# Altium PCB Main.PcbDoc
Units mm, origin at the board's own origin, x right, y up, seen from the top; angles counter-clockwise.
Board outline 108.2 x 55.5 mm, 2 copper layers (Top Layer, Bottom Layer); 44 components, 33 nets, 136 pads, 6 vias.
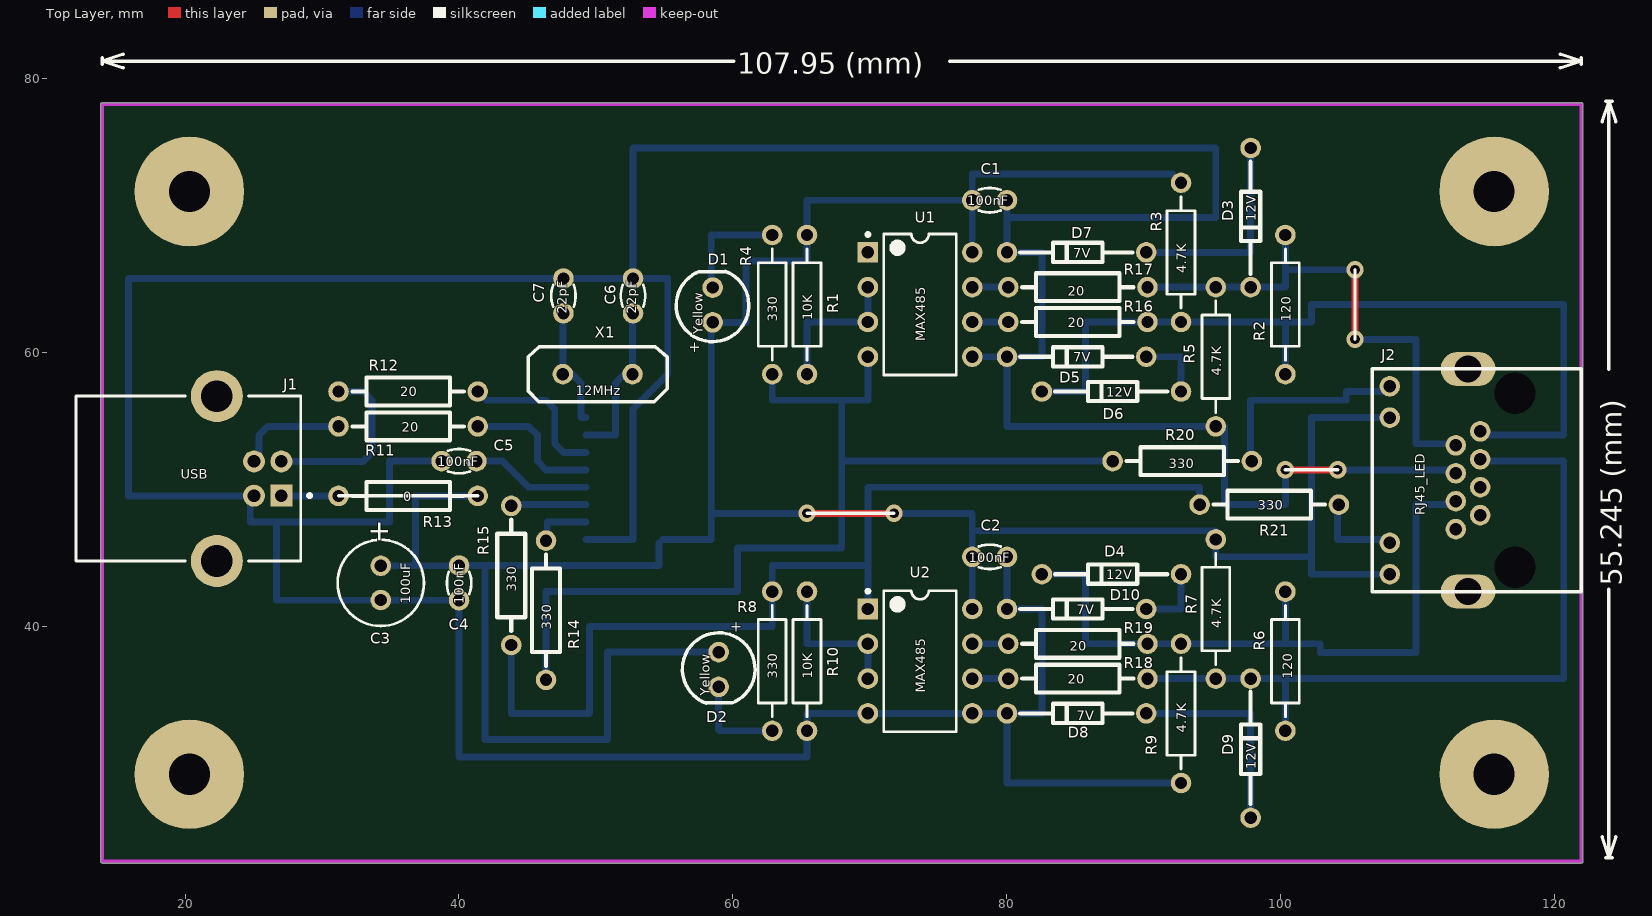
[diagram p0: Top Layer view]
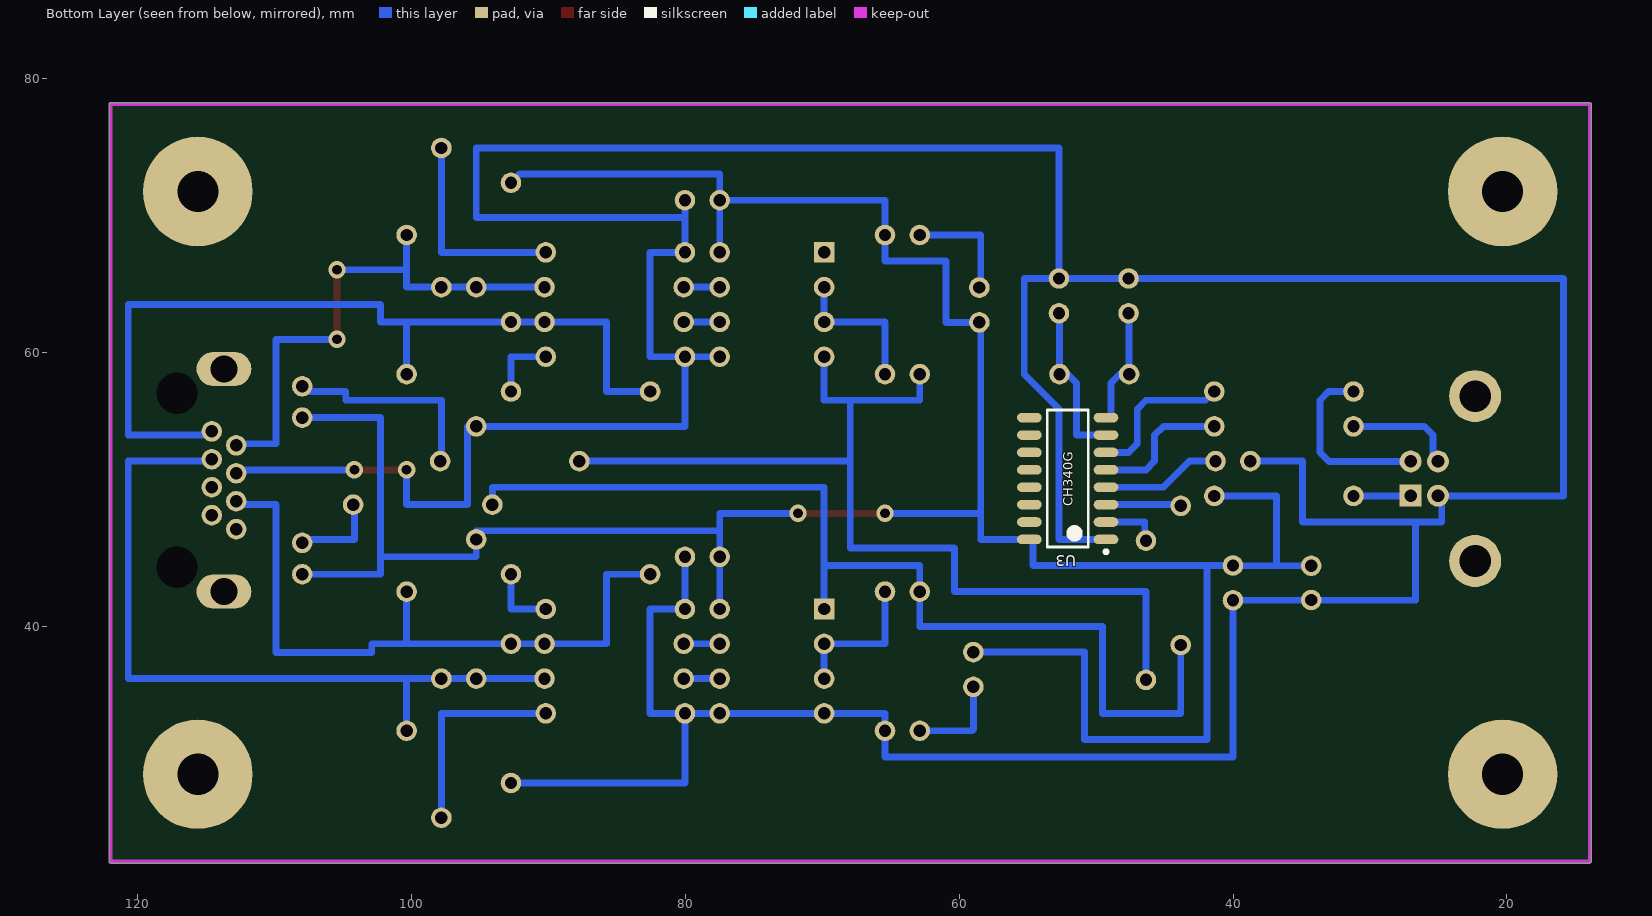
[diagram p1: Bottom Layer view, seen from below]

## Layer stack, top to bottom
Top Solder: solder mask 0.0102, Solder Resist, Dk 3.5
Top Layer: signal copper 0.0356
Dielectric 1: dielectric 0.32, FR-4, Dk 4.8
Bottom Layer: signal copper 0.0356
Bottom Solder: solder mask 0.0102, Solder Resist, Dk 3.5

## Board outline
13.97,22.733 cw(c13.97,22.86) 13.843,22.86 13.843,78.105 cw(c13.97,78.105) 13.97,78.232 121.92,78.232 cw(c121.92,78.105) 122.047,78.105 122.047,22.86 cw(c121.92,22.86) 121.92,22.733

## Design rules (kind name [scope] priority, off if disabled: settings)
Clearance [All] p1: gap=0.3
ComponentClearance [All] p1 off: gap=0 collisioncheckmode=3 verticalgap=0 showdistances=FALSE
Height [All] p1: minheight=0 maxheight=50 prefheight=12.7
PolygonConnect [All] p1: connectstyle=Relief reliefconductorwidth=0.254 reliefentries=4 polygonreliefangle="90 Angle" airgapwidth=0.254
RoutingVias [All] p1: holewidth=0.711 width=1.27 viastyle="Through Hole" minholewidth=0.711 minwidth=1.27 maxholewidth=0.711 maxwidth=1.27
SolderMaskExpansion [All] p1: expansion=0.102
Width [All] p1: maxlimit=0.5 minlimit=0.5 preferedwidth=0.5
28 further rules are at their usual default settings.

## Components (designator, comment, footprint, x,y, rotation, side; value= is the part's Value field where it differs from the comment)
C1 "100nF" CAPNTO2.54-3.05x1.78A 78.74,71.12 r180 top
C2 "100nF" CAPNTO2.54-3.05x1.78A 78.74,45.085 r180 top
C3 "100uF" CAPPR2.5-6.3x5 34.29,43.18 r270 top
C4 "100nF" CAPNTO2.54-3.05x1.78A 40.005,43.18 r90 top
C5 "100nF" CAPNTO2.54-3.05x1.78A 40.005,52.07 r0 top
C6 "22pF" CAPNTO2.54-3.05x1.78A 52.705,64.135 r90 top
C7 "22pF" CAPNTO2.54-3.05x1.78A 47.625,64.135 r90 top
D1 "Yellow" LED-5mm_Red 58.42,63.5 r90 top
D2 "Yellow" LED-5mm_Red 59.055,36.83 r270 top
D3 "12V" DIODE0.4_Glass 97.79,69.85 r270 top
D4 "12V" DIODE0.4_Glass 87.63,43.815 r180 top
D5 "7V" DIODE0.4_Glass 85.09,59.69 r180 top
D6 "12V" DIODE0.4_Glass 87.63,57.15 r180 top
D7 "7V" DIODE0.4_Glass 85.09,67.31 r180 top
D8 "7V" DIODE0.4_Glass 85.09,33.655 r180 top
D9 "12V" DIODE0.4_Glass 97.79,31.115 r90 top
D10 "7V" DIODE0.4_Glass 85.09,41.275 r180 top
J1 "USB" USB2.5-2H4D 26.035,50.8 r180 top
J2 "RJ45_LED" RJ45-AMP_LED 107.95,43.815 r90 top
R1 "10K" AXIAL-0.4#1 65.405,63.5 r90 top
R2 "120" AXIAL-0.4#1 100.33,63.5 r90 top
R3 "4.7K" AXIAL-0.4#1 92.71,67.31 r270 top
R4 "330" AXIAL-0.4#1 62.865,63.5 r90 top
R5 "4.7K" AXIAL-0.4#1 95.25,59.69 r270 top
R6 "120" AXIAL-0.4#1 100.33,37.465 r90 top
R7 "4.7K" AXIAL-0.4#1 95.25,41.275 r270 top
R8 "330" AXIAL-0.4#1 62.865,37.465 r270 top
R9 "4.7K" AXIAL-0.4#1 92.71,33.655 r270 top
R10 "10K" AXIAL-0.4#1 65.405,37.465 r90 top
R11 "20" AXIAL-0.4#2 37.465,54.61 r180 top
R12 "20" AXIAL-0.4#2 37.465,57.15 r180 top
R13 "0" AXIAL-0.4#2 37.465,49.53 r180 top
R14 "330" AXIAL-0.4#2 46.355,40.005 r90 top
R15 "330" AXIAL-0.4#2 43.815,42.545 r90 top
R16 "20" AXIAL-0.4#2 86.36,62.23 r180 top
R17 "20" AXIAL-0.4#2 86.36,64.77 r180 top
R18 "20" AXIAL-0.4#2 86.36,36.195 r180 top
R19 "20" AXIAL-0.4#2 86.36,38.735 r180 top
R20 "330" AXIAL-0.4#2 93.98,52.07 r180 top
R21 "330" AXIAL-0.4#2 100.33,48.895 r180 top
U1 "MAX485" PA8 73.66,63.5 r0 top
U2 "MAX485" PA8 73.66,37.465 r0 top
U3 "CH340G" SOIC127P602-16BM 52.07,50.8 r0 bottom
X1 "12MHz" XTAL_1 50.165,58.42 r180 top

## Footprints (in the part's own frame and the unit in brackets; to place one, negate y for a bottom-side part, rotate by r counter-clockwise, add the part's x,y. Pads: shape width x height; smd on the part's side, far side on the other; paste and mask are expansions set on the pad)
AXIAL-0.4#1 [mm] "Axial Device, Thru-Hole; 2 Leads; 0.4 in Pin Spacing"
  round 1.5 hole 0.9: 1(-5.08,0) 2(5.08,0)
  silkscreen extent -4.06,-1.02 4.06,1.02
AXIAL-0.4#2 [mm]
  round 1.5 hole 0.9: 1(-3.9,0) 2(6.26,0)
  silkscreen extent -2.88,-1.02 5.24,1.02, body extent -4.19,-1.19 6.58,1.12, height 3.51
CAPNTO2.54-3.05x1.78A [mm] "Capacitor, Radial, Tantalum, Non-Polarised; Body 3.05 x 1.78 x 3.43 mm (WxTxH max); Pin Spacing 2.54 mm (typ)"
  round 1.5 hole 0.9: 1(-1.27,0) 2(1.27,0)
  silkscreen extent -0.8,-0.89 0.8,0.89
CAPPR2.5-6.3x5 [mm] "Capacitor, Electrolytic, Radial; Body 6.3 x 5 mm (Dia.xH typ); Pin Spacing 2.5 mm (typ)"
  round 1.5 hole 0.9: 1(-1.25,0) 2(1.25,0)
  silkscreen extent -3.15,-3.15 3.15,3.15
DIODE0.4_Glass [mm] "created by: M.Hariri (designer)"
  round 1.5 hole 0.9: 1(-5.08,0) 2(5.08,0)
  silkscreen extent -4.08,-0.7 4.12,0.7
LED-5mm_Red [mm]
  round 1.5 hole 0.9: 1(-1.3,-0.1) 2(1.24,-0.1)
  silkscreen extent -2.71,-2.74 2.43,2.56, body extent -2.6,-2.64 2.48,2.46, height 9.6
PA8 [mm] "DIP, 8-Leads, Row Spacing 7.62mm, Pitch 2.54mm, Body 9.38x7.24mm"
  rect 1.5x1.5 hole 0.9: 1(-3.81,3.81)
  round 1.5 hole 0.9: 2(-3.81,1.27) 3(-3.81,-1.27) 4(-3.81,-3.81) 5(3.81,-3.81) 6(3.81,-1.27) 7(3.81,1.27) 8(3.81,3.81)
  silkscreen extent -3.93,-5.15 2.65,5.23, body extent -3.6,-5.15 3.6,5.15, height 4.58
RJ45-AMP_LED [mm]
  round 1.5 hole 0.9: 1(10.43,-6.6) 2(9.41,-4.82) 3(8.39,-6.6) 4(7.37,-4.82) 5(6.35,-6.6) 6(5.33,-4.82) 7(4.31,-6.6) 8(3.29,-4.82) 13(13.72,0) 14(11.43,0) 15(2.29,0) 16(0,0)
  round 0 hole 3: 9(13.21,-9.14) 10(0.51,-9.14)
  oval 2.5x4 hole 2: 11(14.985,-5.71) 12(-1.265,-5.71)
  silkscreen extent -1.26,-13.97 14.99,1.27
SOIC127P602-16BM [mm] "SOIC, 16-Leads, Body 9.9x3.9mm, Pitch 1.27mm, IPC Low Density"
  oval 1.8x0.7 smd: 1(-2.8,4.445) 2(-2.8,3.175) 3(-2.8,1.905) 4(-2.8,0.635) 5(-2.8,-0.635) 6(-2.8,-1.905) 7(-2.8,-3.175) 8(-2.8,-4.445) 9(2.8,-4.445) 10(2.8,-3.175) 11(2.8,-1.905) 12(2.8,-0.635) 13(2.8,0.635) 14(2.8,1.905) 15(2.8,3.175) 16(2.8,4.445)
  silkscreen extent -2.92,-5 1.5,5.47, body extent -2,-5 2,5, height 1.73
USB2.5-2H4D [mm] "Connector; USB1.1, Type B, Thru-Hole; 4 Position; Right Angle"
  rect 1.6x1.6 hole 0.92: 1(-1,1.25)
  round 1.6 hole 0.92: 2(-1,-1.25) 3(1,-1.25) 4(1,1.25)
  round 3.8 hole 2.3: 5(3.71,6.02) 6(3.71,-6.02)
  silkscreen extent -3.18,-6.02 13.99,6.02, body extent -2.41,-6.02 13.99,6.02, height 11.1
XTAL_1 [mm]
  round 1.5 hole 0.9: 1(-2.5,0) 2(2.58,0)
  silkscreen extent -5.02,-2 5.13,2, body extent -5.33,-1.52 5.33,1.52, height 3.39

## Part data
C1 C2 C4 C5 C6 C7: library part Cap, "Capacitor"
C3: library part "Cap Pol1", "Polarized Capacitor (Radial)"
D1 D2: library part LED, "Typical INFRARED GaAs LED"
D3 D4 D5 D6 D7 D8 D9 D10: library part "D Zener", "Zener Diode"
R1 R2 R3 R4 R5 R6 R7 R8 R9 R10 R11 R12 R13 R14 R15 R16 R17 R18 R19 R20 R21: library part Res1, "Resistor"
U1 U2: library part MAX485CPA, "Low-Power, Slew-Rate-Limited RS-485/RS-422 Transceiver"
U3: "USB to UART Interface"
X1: library part XTAL, "Crystal Oscillator"

## Free pads (board coordinates)
  round 8 hole 3: 0(20.32,29.21) 0(20.32,71.755) 0(115.57,29.21) 0(115.57,71.755)

## Via types
v1: diameter 1.27, hole 0.711, Top Layer to Bottom Layer, 6 vias

## Nets (pads, with @x,y where several pads share a name; then routed paths per layer and width w, separated by ;. In a path a pad name is that pad's centre, name@x,y a point inside that pad or via, vN(x,y) a via of type N, cw(c..) or ccw(c..) an arc to the next point about the centre after c; other vN are vias at no path point)
D+: R11.1 U3.5 | length 10.3
  Bottom Layer w0.5: R11.1 45.085,54.61 45.72,53.975 45.72,52.07 46.355,51.435 U3.5
D-: R12.1 U3.6 | length 11.2
  Bottom Layer w0.5: R12.1 42,56.515 46.355,56.515 46.99,55.88 46.99,53.34 47.625,52.705 U3.6
GND: C1.1 C2.1 C3.2 C4.1 C5.1 C6.2 C7.2 D5.2 D7.2 D8.2 D10.2 J1.4 J2.4 R5.2 R9.2 R10.1 U1.5 U2.4 U2.5 U3.1 | length 353.9
  Top Layer w0.5: v1(100.33,51.435) v1(104.14,51.435)
  Bottom Layer w0.5: C3.2@34.27,41.91 26.69,41.91 26.69,47.605 26.67,47.625 ; C3.2@34.29,41.91 C4.1 40.005,30.48 65.405,30.48 R10.1 65.405,33.655 U2.4 U2.5 D8.2 ; C5.1 34.925,52.07 34.925,47.625 26.67,47.625 ; U3.1 52.705,46.355 52.705,55.88 55.245,58.42 55.245,65.405 C6.2 ; U1.5 D5.2 ; C2.1 D10.2 82.55,41.275 82.55,33.655 D8.2 ; C1.1 80.01,69.85 ; R9.2 80.01,28.575 D8.2 ; v1(100.33,51.435) 100.33,48.895 95.885,48.895 95.885,54.61 R5.2 80.01,54.61 D5.2 ; v1(104.14,51.435) 112.53,51.435 112.78,51.185 J2.4 ; 26.67,47.625 24.765,47.625 24.765,49.28 25.015,49.53 15.875,49.53 15.875,65.405 C7.2 C6.2 ; C6.2 52.705,74.93 95.25,74.93 95.25,69.85 80.01,69.85 ; D5.2 82.55,59.69 82.55,67.31 D7.2 80.01,69.85
NetC5_2: C5.2 U3.4 | length 8.8
  Bottom Layer w0.5: C5.2 43.18,52.07 45.085,50.165 U3.4
NetC6_1: C6.1 U3.7 X1.1 | length 11.9
  Bottom Layer w0.5: U3.7 51.435,53.975 51.435,57.785 52.07,58.42 X1.1 C6.1@52.665,62.825
NetC7_1: C7.1 U3.8 X1.2 | length 8.9
  Bottom Layer w0.5: C7.1@47.585,62.825 X1.2 48.26,58.42 48.895,57.785 48.895,55.245 U3.8
NetD1_2: D1.2 R4.2 | length 8.4
  Bottom Layer w0.5: D1.2 58.45,64.74 58.42,64.77 58.42,68.58 R4.2
NetD2_2: D2.2 R8.2 | length 7.1
  Bottom Layer w0.5: D2.2 58.955,32.485 59.055,32.385 R8.2
NetD3_1: D3.1 D7.1 | length 15.2
  Bottom Layer w0.5: D7.1 97.79,67.31 D3.1
NetD4_1: D4.1 D10.1 | length 5.1
  Bottom Layer w0.5: D10.1 92.71,41.275 D4.1
NetD5_1: D5.1 D6.1 | length 5.1
  Bottom Layer w0.5: D5.1 92.71,59.69 D6.1
NetD8_1: D8.1 D9.1 | length 15.2
  Bottom Layer w0.5: D8.1 97.79,33.655 D9.1
NetJ1_1: J1.1 R13.2 | length 4.2
  Bottom Layer w0.5: J1.1 27.055,49.53 R13.2
NetJ1_2: J1.2 R12.2 | length 13.4
  Bottom Layer w0.5: J1.2 33,52.05 33.655,52.705 33.655,56.515 33.02,57.15 R12.2
NetJ1_3: J1.3 R11.2 | length 8.1
  Bottom Layer w0.5: J1.3 25.4,52.415 25.4,53.975 26.035,54.61 R11.2
NetJ2_13: J2.13 R20.1 | length 15.5
  Bottom Layer w0.5: R20.1@97.79,52.16 97.79,56.515 104.775,56.515 104.775,57.15 107.95,57.15 J2.13
NetJ2_15: J2.15 R21.1 | length 6.5
  Bottom Layer w0.5: R21.1@104.14,48.805 104.14,46.355 107.95,46.355 J2.15
NetR1_1: R1.1 U1.2 U1.3 | length 10.8
  Bottom Layer w0.5: R1.1 65.405,62.23 U1.3 U1.2
NetR10_2: R10.2 U2.2 U2.3 | length 10.8
  Bottom Layer w0.5: R10.2 65.405,38.735 U2.2 U2.3
NetR14_2: R14.2 U3.2 | length 4.1
  Bottom Layer w0.5: R14.2@46.445,46.355 46.445,47.625 U3.2
NetR15_2: R15.2 U3.3 | length 5.5
  Bottom Layer w0.5: R15.2 43.815,48.895 U3.3
NetR16_2: R16.2 U1.6 | length 2.6
  Bottom Layer w0.5: U1.6 R16.2
NetR17_2: R17.2 U1.7 | length 2.6
  Bottom Layer w0.5: U1.7 R17.2
NetR18_2: R18.2 U2.6 | length 2.6
  Bottom Layer w0.5: U2.6 R18.2
NetR19_2: R19.2 U2.7 | length 2.6
  Bottom Layer w0.5: U2.7 R19.2
RS485_RX: R4.1 R14.1 R20.2 U1.4 | length 73.8
  Bottom Layer w0.5: R14.1 46.355,42.545 60.325,42.545 60.325,45.72 67.945,45.72 67.945,52.07 ; R4.1 62.865,56.515 67.945,56.515 ; U1.4 69.85,56.515 67.945,56.515 ; R20.2 67.945,52.07 ; 67.945,52.07 67.945,56.515
RS485_RX_A: D9.2 J2.3 R6.1 R7.2 R18.1 | length 56.2
  Bottom Layer w0.5: R18.1 100.33,36.195 ; R6.1 100.33,36.195 ; J2.3 114.685,52.07 120.65,52.07 120.65,36.195 100.33,36.195
RS485_RX_B: D4.2 J2.6 R6.2 R9.1 R19.1 | length 50.6
  Bottom Layer w0.5: D4.2 85.725,43.815 85.725,38.735 R19.1 R9.1 100.33,38.735 ; R6.2 100.33,38.735 ; J2.6 112.52,48.895 109.855,48.895 109.855,38.1 102.87,38.1 102.87,38.735 100.33,38.735
RS485_TX: R8.1 R15.1 R21.2 U2.1 | length 76.2
  Bottom Layer w0.5: R15.1 43.815,33.655 49.53,33.655 49.53,40.005 62.865,40.005 R8.1 62.865,44.45 69.85,44.45 ; U2.1 69.85,44.45 ; R21.2 94.07,50.165 69.85,50.165 69.85,44.45
RS485_TX_A: D6.2 J2.1 R2.1 R3.2 R16.1 | length 64
  Bottom Layer w0.5: D6.2 85.725,57.15 85.725,62.23 R16.1 R3.2 100.33,62.23 ; R2.1 100.33,62.23 ; J2.1 114.665,54.245 114.935,53.975 120.65,53.975 120.65,63.5 102.235,63.5 102.235,62.23 100.33,62.23
RS485_TX_B: D3.2 J2.2 R2.2 R5.1 R17.1 | length 39.3
  Top Layer w0.5: v1(105.41,60.96) v1(105.41,66.04)
  Bottom Layer w0.5: R17.1 R5.1 100.33,64.77 100.33,66.04 ; R2.2 100.33,66.04 ; v1(105.41,60.96) 109.855,60.96 109.855,53.34 112.885,53.34 J2.2 ; v1(105.41,66.04) 100.33,66.04
VCC: C1.2 C2.2 C3.1 C4.2 D1.1 D2.1 J2.14 J2.16 R1.2 R3.1 R7.1 R13.1 U1.8 U2.8 U3.16 | length 211.7
  Top Layer w0.5: v1(65.405,48.26) v1(71.755,48.26)
  Bottom Layer w0.5: C3.1 36.83,44.43 ; C4.2@39.985,44.43 36.83,44.43 ; C4.2 41.91,44.45 ; R13.1 36.83,49.53 36.83,44.43 ; U3.16@54.61,46.095 54.61,44.45 41.91,44.45 ; U3.16 58.42,46.355 58.42,48.26 ; D1.1@58.42,62.1 58.42,48.26 ; D1.1 60.96,62.2 60.96,66.675 65.405,66.675 R1.2 65.405,71.12 C1.2 ; D2.1 50.83,38.13 50.83,31.75 41.91,31.75 41.91,44.45 ; v1(65.405,48.26) 58.42,48.26 ; v1(71.755,48.26) 77.47,48.26 77.47,46.99 ; U2.8 C2.2 77.47,46.99 ; U1.8 C1.2 ; R3.1 92.075,73.025 77.47,73.025 C1.2 ; J2.16 102.235,43.815 102.235,45.085 ; J2.14 102.235,55.245 102.235,45.085 ; 77.47,46.99 95.25,46.99 R7.1 95.25,45.085 102.235,45.085
VDD: 
pads on no net: J1.5 J1.6 J2.5 J2.7 J2.8 J2.9 J2.10 J2.11 J2.12 U1.1 U3.9 U3.10 U3.11 U3.12 U3.13 U3.14 U3.15

## Keep-outs
Keep-Out Layer:
  lines w0.254: 13.97,22.86 13.97,78.105 121.92,78.105 121.92,22.86 13.97,22.86

## Silkscreen, mask and mechanical layers (free items; w line width, h text height)
Top Overlay:
  lines w0.254: 13.97,81.026 13.97,81.534 ; 15.494,80.772 13.97,81.28 ; 15.494,81.788 13.97,81.28 ; 31.205,49.53 41.365,49.53 ; 60.048,81.28 13.97,81.28 ; 65.405,48.26 71.755,48.26 ; 75.842,81.28 121.92,81.28 ; 100.33,51.435 104.14,51.435 ; 105.41,60.96 105.41,66.04 ; 120.396,80.772 121.92,81.28 ; 120.396,81.788 121.92,81.28 ; 121.92,81.026 121.92,81.534 ; 123.444,24.638 123.952,23.114 ; 123.444,76.835 123.952,78.359 ; 123.698,23.114 124.206,23.114 ; 123.698,78.359 124.206,78.359 ; 123.952,42.713 123.952,23.114 ; 123.952,58.76 123.952,78.359 ; 124.46,24.638 123.952,23.114 ; 124.46,76.835 123.952,78.359
  text "107.95 (mm)" at 60.302,80.366 h1.52
  text "55.245 (mm)" at 124.866,42.967 h1.52 r90

## Text inside footprints (layer, text, board x,y; h text height)
C3: Top Overlay "+" at 33.54,47.805 h1.5 r270
D1: Top Overlay "+" at 57.555,59.914 h0.8 r90
D2: Top Overlay "+" at 59.92,40.416 h0.8 r270